# Altium PCB COURONNE PARTIE I PCB.PCBDOC
Units mil, origin at the board's own origin, x right, y up, seen from the top; angles counter-clockwise.
Board outline 11800 x 7870 mil, 2 copper layers (Top Layer, Bottom Layer); 6 components, 6 nets, 22 pads, 1 vias.
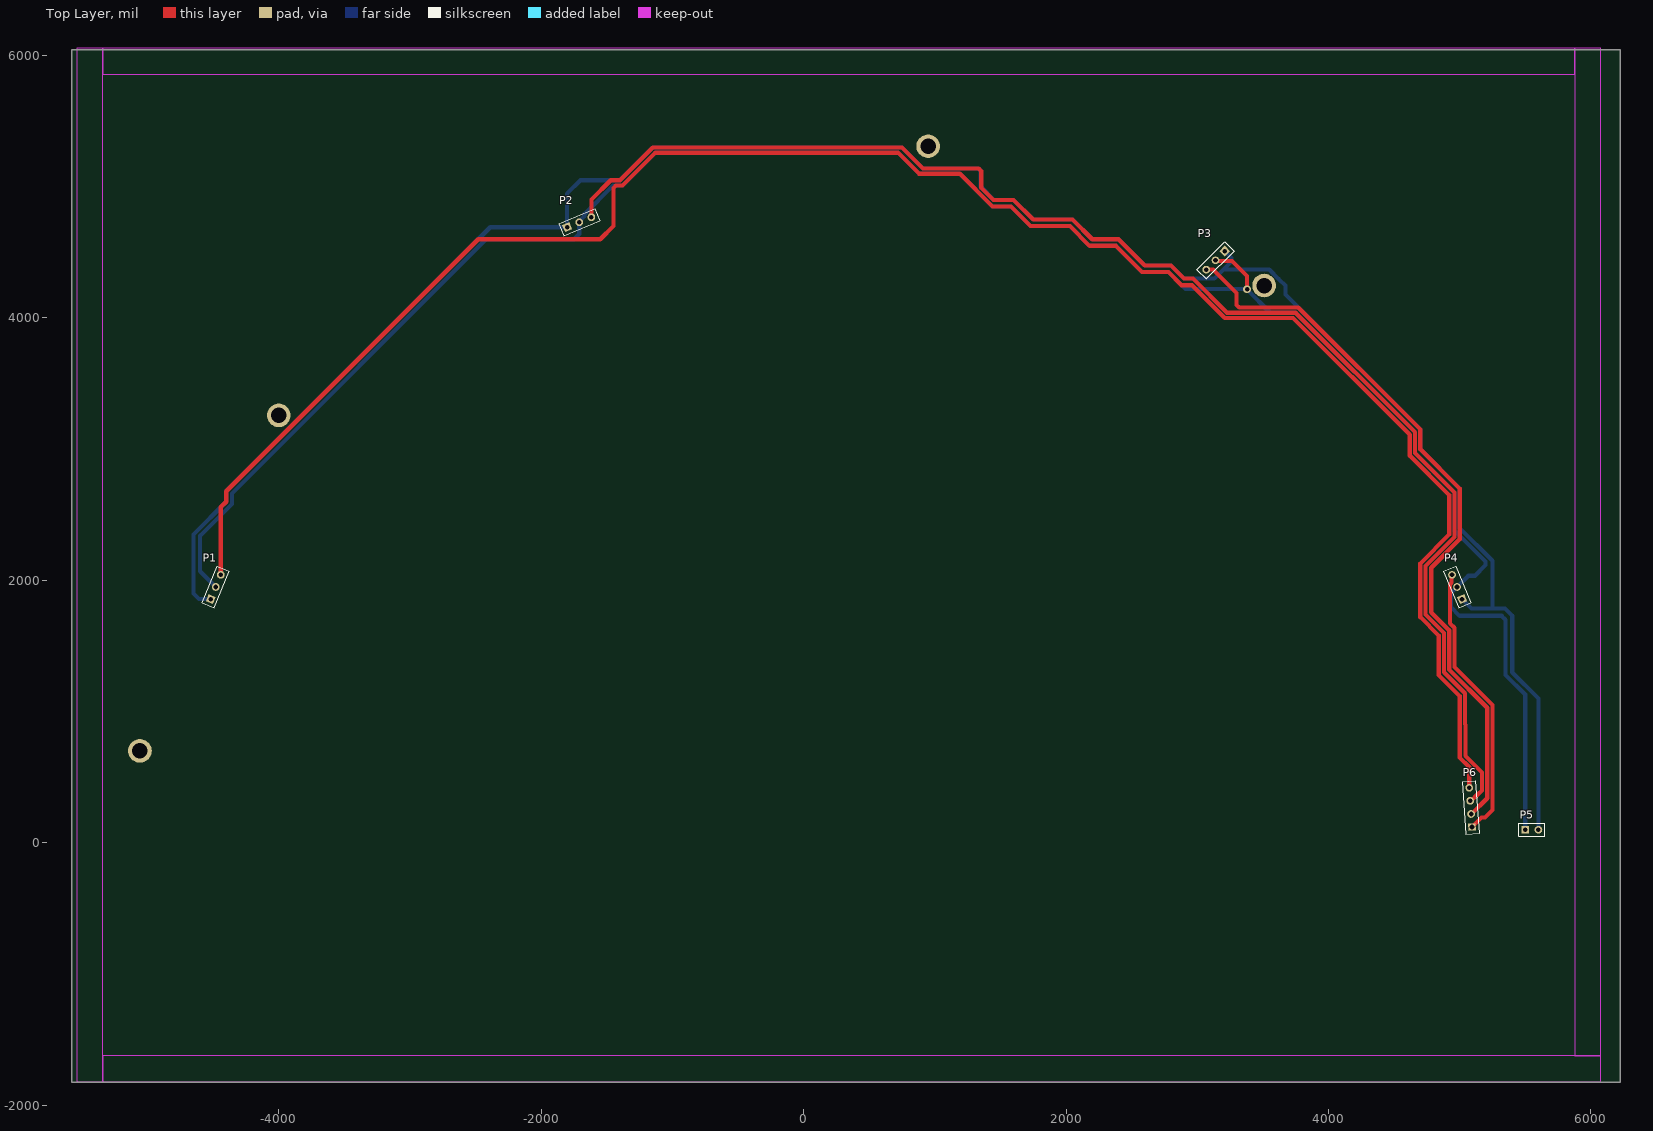
[diagram p0: Top Layer view]
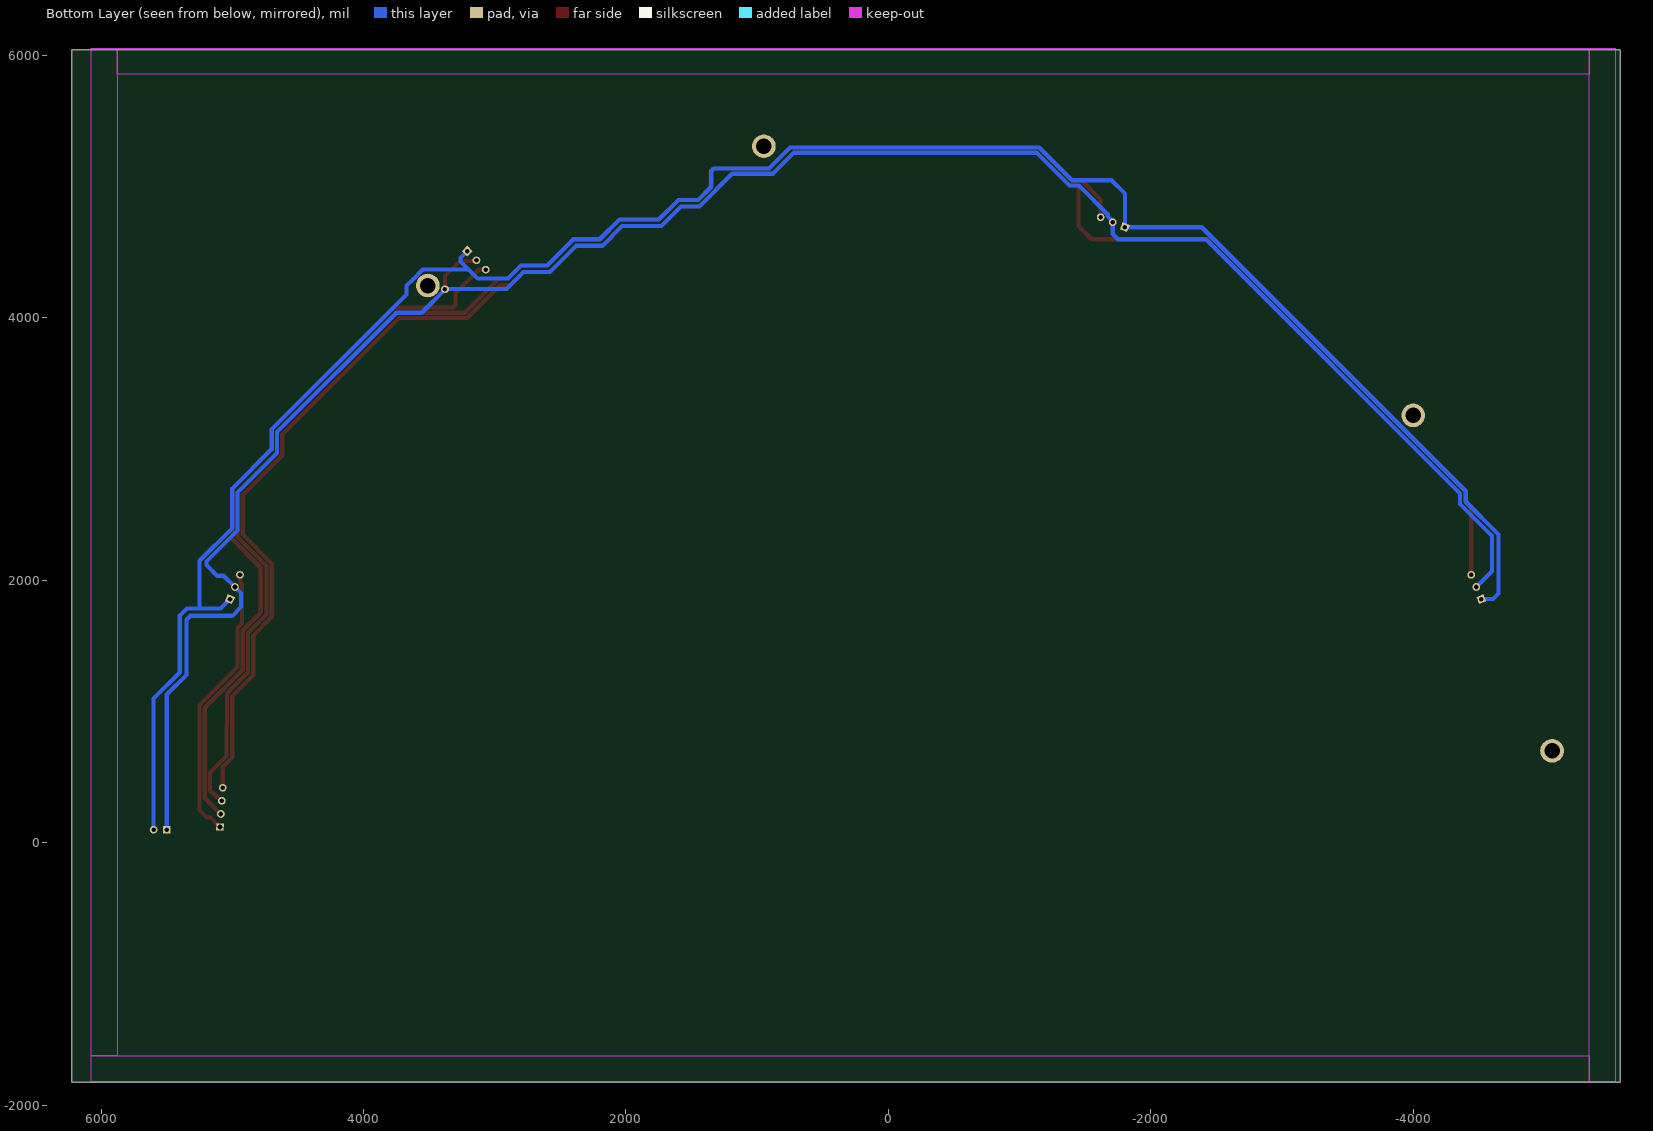
[diagram p1: Bottom Layer view, seen from below]

## Layer stack, top to bottom
Top Solder: solder mask 0.4, Solder Resist, Dk 3.5
Top Layer: signal copper 1.4
Dielectric1: dielectric 12.6, FR-4, Dk 4.8
Bottom Layer: signal copper 1.4
Bottom Solder: solder mask 0.4, Solder Resist, Dk 3.5

## Board outline
-5576.97,-1826.38 6223.03,-1826.38 6223.03,6043.62 -5576.97,6043.62

## Design rules (kind name [scope] priority, off if disabled: settings)
Clearance Clearance_bottom_polygon [OnLayer('Bottom Layer') Or OnLayer('Multi-Layer') vs OnLayer('Bottom Layer')  And  InPoly] p1: gap=20 ignorepadtopadclearanceinfootprint=FALSE except(0: Arc-Hole Track-Hole SMDPad-Hole THPad-Hole Via-Hole Fill-Hole Poly-Hole Region-Hole Text-Hole)
Clearance Clearance_bottom_polygon_keepout [OnLayer('Bottom Layer') Or OnLayer('Multi-Layer') Or InPoly vs OnLayer('Keepout')] p2: gap=0 ignorepadtopadclearanceinfootprint=FALSE
Clearance Clearance_top_polygon [OnLayer('Top Layer')  Or OnLayer('Multi-Layer') vs OnLayer('Top Layer') And InPoly] p3: gap=20 ignorepadtopadclearanceinfootprint=FALSE except(0: Arc-Hole Track-Hole SMDPad-Hole THPad-Hole Via-Hole Fill-Hole Poly-Hole Region-Hole Text-Hole)
Clearance Clearance_bottom [OnLayer('Bottom Layer') Or OnLayer('Multi-Layer') vs OnLayer('Bottom Layer')  And Not InPoly] p4: gap=8 ignorepadtopadclearanceinfootprint=FALSE except(0: Arc-Hole Track-Hole SMDPad-Hole THPad-Hole Via-Hole Fill-Hole Poly-Hole Region-Hole Text-Hole)
Clearance Clearance_top [OnLayer('Top Layer')  Or OnLayer('Multi-Layer') vs OnLayer('Top Layer') And Not InPoly] p5: gap=8 ignorepadtopadclearanceinfootprint=FALSE except(0: Arc-Hole Track-Hole SMDPad-Hole THPad-Hole Via-Hole Fill-Hole Poly-Hole Region-Hole Text-Hole)
Clearance Clearance_pad_to_pad [OnLayer('Multi-Layer') vs OnLayer('Multi-Layer')] p6: gap=10 ignorepadtopadclearanceinfootprint=FALSE except(0: Arc-Hole Track-Hole SMDPad-Hole THPad-Hole Via-Hole Fill-Hole Poly-Hole Region-Hole Text-Hole)
ComponentClearance ComponentClearance_bottom [OnLayer('Bottom Overlay') vs OnLayer('Bottom Overlay')] p1: gap=0 collisioncheckmode=3 verticalgap=10 showdistances=FALSE
ComponentClearance ComponentClearance_top [OnLayer('Top Overlay') vs OnLayer('Top Overlay')] p2: gap=0 collisioncheckmode=3 verticalgap=10 showdistances=FALSE
FabricationTestPointUsage TestPointUsage [All] p1: valid=0 allowmultiple=FALSE
FabricationTestpoint Testpoint [All] p1: side=3 testpointundercomponent=TRUE minsize=40 maxsize=100 preferedsize=60 minholesize=0 maxholesize=40 preferedholesize=32 testpointgrid=1 allowsidetop=TRUE allowsidebottom=TRUE usegrid=TRUE gridtolerance=0.01
HoleSize [All] p1: absolutevalues=TRUE maxlimit=1000 minlimit=16 maxpercent=80.000 minpercent=20.000
MinimumAnnularRing [PadXSize_AllLayers = PadYSize_AllLayers] p1: minimumring=10
PermittedLayers [All] p1: toplayerpermitted=TRUE bottomlayerpermitted=TRUE
PolygonConnect [All] p1: connectstyle=Relief reliefconductorwidth=24 reliefentries=4 polygonreliefangle="90 Angle" airgapwidth=10
RoutingVias [All] p1: holewidth=16 width=50 viastyle="Through Hole" minholewidth=16 minwidth=36 maxholewidth=1000 maxwidth=1000
SMDToPlane [All] p1: distance=0
SolderMaskExpansion [All] p1: expansion=4 istentingtop=FALSE
ViasUnderSMD [All] p1: allowed=FALSE
Width Width_botom_top [OnLayer('Bottom Layer') or OnLayer('Top Layer')] p1: maxlimit=10000 minlimit=10 preferedwidth=32
26 further rules are at their usual default settings.

## Components (designator, comment, footprint, x,y, rotation, side; value= is the part's Value field where it differs from the comment)
P1 "Header 3" HDR1X3 -4518.27,1857.61 r67.5 top
P2 "Header 3" HDR1X3 -1802.39,4691.73 r22.5 top
P3 "Header 3" HDR1X3 3210,4510 r225 top
P4 "Header 3" HDR1X3 5018.27,1857.61 r112.5 top
P5 "Header 2" HDR1X2 5500,100 r0 top
P6 "Header 4" HDR1X4 5093.95,120.49 r94 top

## Footprints (in the part's own frame and the unit in brackets; to place one, negate y for a bottom-side part, rotate by r counter-clockwise, add the part's x,y. Pads: shape width x height; smd on the part's side, far side on the other; paste and mask are expansions set on the pad)
HDR1X2 [mm] "Connector; Header; 2 Position"
  rect 1.5x1.5 hole 0.9: 1(0,0)
  round 1.5 hole 0.9: 2(2.54,0)
  silkscreen extent -1.27,-1.27 3.81,1.27
HDR1X3 [mm] "Connector; Header; 3 Position"
  rect 1.5x1.5 hole 0.9: 1(0,0)
  round 1.5 hole 0.9: 2(2.54,0) 3(5.08,0)
  silkscreen extent -1.27,-1.27 6.35,1.27
HDR1X4 [mm] "Connector; Header; 4 Position"
  rect 1.5x1.5 hole 0.9: 1(0,0)
  round 1.5 hole 0.9: 2(2.54,0) 3(5.08,0) 4(7.62,0)
  silkscreen extent -1.27,-1.27 8.89,1.27

## Part data
P1 P2 P3 P4: "Header, 3-Pin", LatestRevisionDate=17-Jul-2002, LatestRevisionNote="Re-released for DXP Platform.", Publisher="Altium Limited"
P5: "Header, 2-Pin", LatestRevisionDate=17-Jul-2002, LatestRevisionNote="Re-released for DXP Platform.", Publisher="Altium Limited"
P6: "Header, 4-Pin", LatestRevisionDate=17-Jul-2002, LatestRevisionNote="Re-released for DXP Platform.", Publisher="Altium Limited"

## Free pads (board coordinates)
  round 180 hole 118.35: ""(-5058,700.67) ""(-3999.59,3257.64) ""(948.63,5308.53) ""(3509.65,4247.48)

## Via types
v1: diameter 59.05, hole 35.43, Top Layer to Bottom Layer, 1 vias

## Nets (pads, with @x,y where several pads share a name; then routed paths per layer and width w, separated by ;. In a path a pad name is that pad's centre, name@x,y a point inside that pad or via, vN(x,y) a via of type N, cw(c..) or ccw(c..) an arc to the next point about the centre after c; other vN are vias at no path point)
"Capteur 1": P1.3 P6.4 | length 14864.9
  Top Layer w32: P1.3 -4441.73,2558.27 -4400,2600 -4400,2680 -2480,4600 -1550,4600 -1450,4700 -1450,4991.25 -1431.25,5010 -1380,5010 -1130,5260 720,5260 880,5100 1190,5100 1440,4850 1580,4850 1730,4700 2030,4700 2180,4550 2380,4550 2580,4350 2780,4350 2880,4250 2960,4250 3210,4000 3730,4000 4620,3110 4620,2950 4920,2650 4920,2350 4700,2130 4700,1720 4840,1580 4840,1280 5000,1120 5000,650 5073.02,576.98 P6.4
"Capteur 2": P2.3 P6.3 | length 10796.9
  Top Layer w32: P2.3 -1617.61,4902.39 -1470,5050 -1400,5050 -1150,5300 750,5300 910,5140 1334.54,5140 1353.28,5121.25 1353.28,4993.28 1446.57,4900 1600,4900 1750,4750 2050,4750 2200,4600 2400,4600 2600,4400 2800,4400 2900,4300 2966.65,4300 3226.65,4040 3750,4040 4660,3130 4660,2970 4960,2670 4960,2330 4740,2110 4740,1740 4880,1600 4880,1300 5040,1140 5040,903.28 5043.28,900 5043.28,663.28 5170,536.57 5170,400 5140.43,370.43 5137.75,370.43 5087.32,320 P6.3
"Capteur 3": P3.3 P6.2 | length 5562.3
  Top Layer w32: P3.3 3121.42,4368.58 3300,4190 3300,4100 3320,4080 3770,4080 4700,3150 4700,3000 5000,2700 5000,2313.43 4783.28,2096.72 4783.28,1756.72 4920,1620 4920,1320 5210,1030 5210,340 5090.24,220.24 P6.2
"Capteur 4": P4.3 P6.1 | length 2142.4
  Top Layer w32: P4.3 4936.55,2037.21 4936.55,1982.25 4926.47,1972.17 4926.47,1672.85 4960,1639.32 4960,1340 5250,1050 5250,250 5193,193 5166.47,193 P6.1
GND: P1.2 P2.2 P3.2 P4.2 P5.1 | length 16109.2
  Top Layer w32: P3.2 3143.93,4434.64 3265.36,4434.64 3380,4320 v1(3380,4220)
  Bottom Layer w32: P1.2 -4600,2070 -4600,2340 -4356.72,2583.28 -4356.72,2663.28 -2420,4600 -1750,4600 -1710,4640 P2.2 -1710,4737.32 -1671.14,4776.18 -1671.14,4790.44 -1451.58,5010 -1380,5010 -1130,5260 720,5260 880,5100 1190,5100 1440,4850 1580,4850 1730,4700 2030,4700 2180,4550 2380,4550 2580,4350 2780,4350 2910,4220 v1(3380,4220) 3380,4215.91 3555.91,4040 3750,4040 4660,3130 4660,2970 4960,2670 4960,2380 5196.75,2143.25 5196.75,2116.75 5115.96,2035.96 5065.96,2035.96 P4.2 4933.25,1903.25 4933.25,1796.75 5000,1730 5320,1730 5350,1700 5350,1280 5500,1130 P5.1
VCC: P1.1 P2.1 P3.1 P4.1 P5.2 | length 16354.1
  Bottom Layer w32: P1.1 -4607.61,1857.61 -4650,1900 -4650,2350 -4400,2600 -4400,2680 -2388.27,4691.73 P2.1 -1802.39,4947.61 -1700,5050 -1400,5050 -1150,5300 750,5300 910,5140 1331.25,5140 1350,5121.25 1350,5000 1450,4900 1600,4900 1750,4750 2050,4750 2200,4600 2400,4600 2600,4400 2800,4400 2900,4300 3130,4300 3200,4370 ; P3.1 3261.75,4458.25 3261.75,4431.75 3200,4370 ; P4.1 5089.43,1786.45 5250,1786.45 ; P5.2 5600,1100 5400,1300 5400,1731.25 5344.8,1786.45 5250,1786.45 ; 3200,4370 3548.35,4370 3623.65,4294.7 3671.8,4246.56 3671.8,4178.2 4700,3150 4700,3000 5000,2700 5000,2400 5250,2150 5250,1786.45

## Keep-outs
Keep-Out Layer:
  rectangle: -5539.17,-1819.28 -5342.32,6054.73
  rectangle: -5342.32,-1819.28 6075,-1622.43
  rectangle: 5878.15,-1622.43 6075,6054.73
  rectangle: -5342.32,5857.88 5878.15,6054.73

## Silkscreen, mask and mechanical layers (free items; w line width, h text height)
Mechanical 1:
  lines w10: 1445,4976.97 cw(c2360,5090) 1482.27,5372.13 ; 1445.84,4976.45 cw(c250,0) 2926.82,4362.3 ; 1482.3,5372.29 ccw(c250,0) -5261.81,0 -4474.41,0 cw(c250,0) 4974.41,0 5761.81,0 ccw(c250,0) 3180.25,4668.37 ; 2926.2,4362.39 ccw(c2360,5090) 3179.44,4667.48
Mechanical 32:
  text "Les bandes en violet delimitent la surface utilisable...." at -5030,6634 h200
  text "Mais vous n'etes pas obliges de tout utiliser!!" at -4330,6218 h200
  text "ATTENTION:" at 6521,5481 h200
  text "Par defaut, les pistes" at 6521,5071 h200
  text "ont 32mil de largeur" at 6516,4693 h200
  text "En cas de besoin, cette largeur" at 6527,4331 h200
  text "peut etre reduite jusqu'a 10 mil" at 6516,3923 h200
  text "Par defaut, les vias" at 6544,3224 h200
  text "ont un diam. de 50 mil" at 6538,2824 h200
  text "En cas de besoin, ce diam." at 6504,2348 h200
  text "peut etre reduit jusqu'a 36 mil" at 6528,1918 h200